# EAGLE board Basic_Arduino (EAGLE 9.6.2)
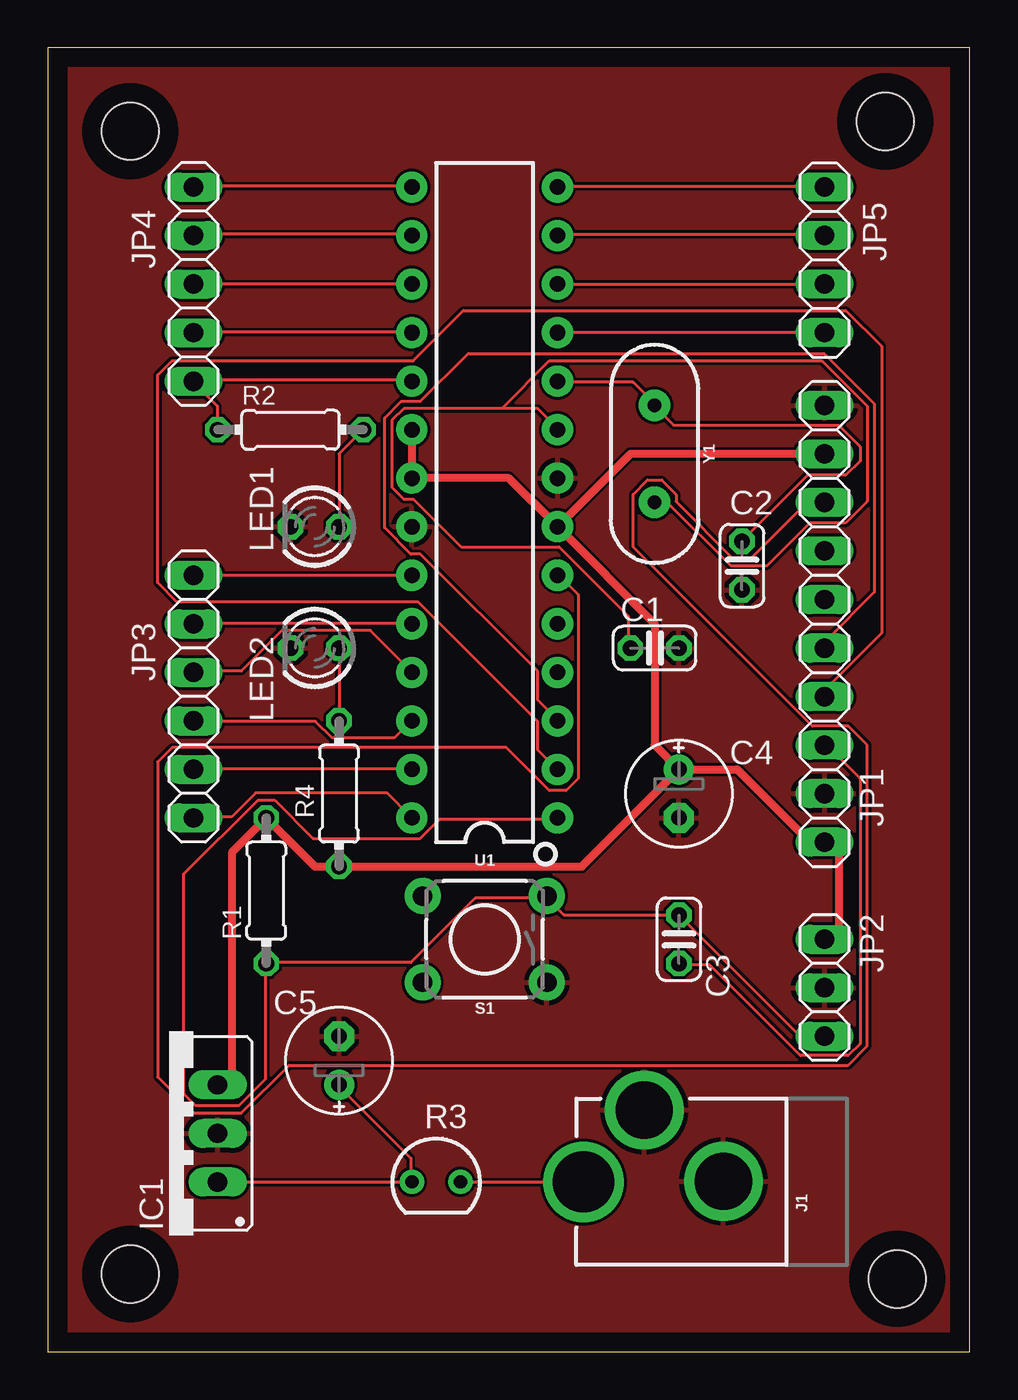
[diagram p0: board, top side]
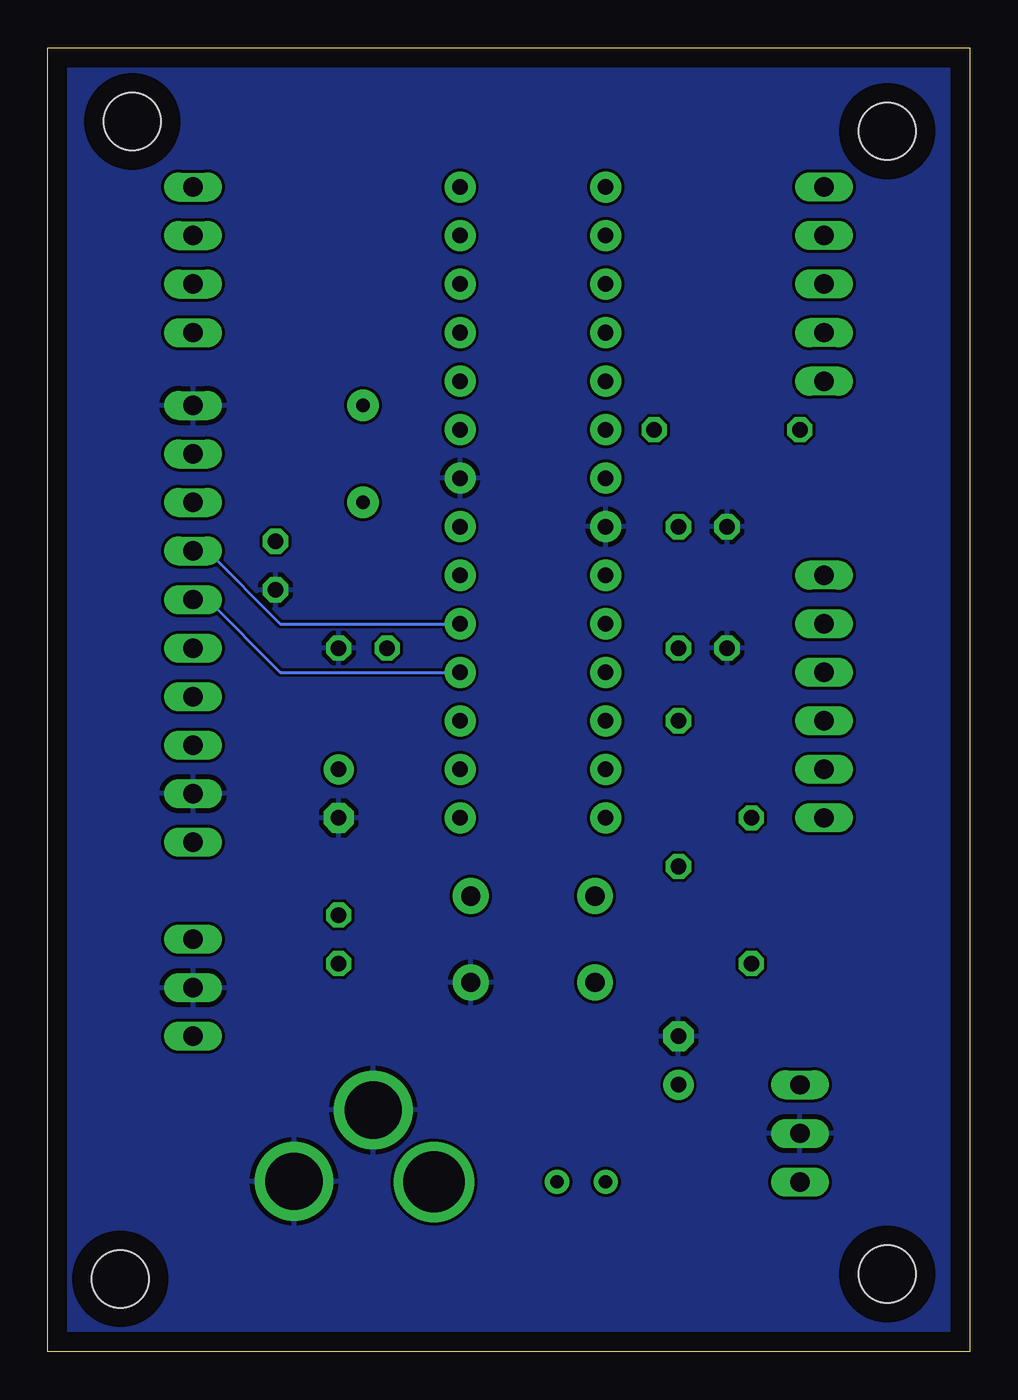
[diagram p1: board, bottom side, seen from below]

Size 48.24 x 68.25 mm. Coordinates in mm from the lower left corner, seen from the top.
Outline: 0,0 48.24,0 48.24,68.25 0,68.25 0,0
Copper layers (1*16): Top 0.035mm / dielectric 1.5mm / Bottom 0.035mm
Design rules "default": minimum track width 6mil, minimum drill 0.35mm, track to track 6mil, track to pad 6mil, pad to pad 6mil, via to via 6mil, smd to smd 6mil, copper to edge 40mil, drill to drill 6mil, minimum pad ring 10mil, minimum via ring 8mil, stop-mask expansion 4mil, vias tented up to drill 0mil, thermal gap 10mil
Holes 3 mm at 4.32,63.88 43.81,64.39 4.32,4.06 44.45,3.81

## Footprints (pad centres in the part's own frame; a part is rotated, then mirrored left to right if it is on the bottom)
C025-024X044 = drill 0.813 octagon: 1 -1.27,0; 2 1.27,0
E2,5-6E = drill 0.813 pad 1.575: + -1.27,0 | drill 0.813 pad 1.575 octagon: - 1.27,0
78XXS = drill 1.016 long: GND 0,-2.54; IN -2.54,-2.54; OUT 2.54,-2.54
POWER_JACK_PTH_LOCK = drill 2.997 pad 4.115: GND 0.025,6.557; GNDBREAK 3.762,10.7 | drill 3.2 pad 4.115: PWR 0,13.878
1X10 = drill 1.016 long: 1 -11.43,0; 2 -8.89,0; 3 -6.35,0; 4 -3.81,0; 5 -1.27,0; 6 1.27,0; 7 3.81,0; 8 6.35,0; 9 8.89,0; 10 11.43,0
1X03 = drill 1.016 long: 1 -2.54,0; 2 0,0; 3 2.54,0
1X06 = drill 1.016 long: 1 -6.35,0; 2 -3.81,0; 3 -1.27,0; 4 1.27,0; 5 3.81,0; 6 6.35,0
1X05 = drill 1.016 long: 1 -5.08,0; 2 -2.54,0; 3 0,0; 4 2.54,0; 5 5.08,0
1X04 = drill 1.016 long: 1 -3.81,0; 2 -1.27,0; 3 1.27,0; 4 3.81,0
LED3MM = drill 0.813 octagon: A -1.27,0; K 1.27,0
0204/7 = drill 0.813 octagon: 1 -3.81,0; 2 3.81,0
SOD70 = drill 0.7 pad 1.27: 1 -1.27,0; 2 1.27,0
TACTILE_SWITCH_PTH_6.0MM = drill 1.016 pad 1.88: 1 -3.251,2.261; 2 3.251,2.261; 3 -3.251,-2.261; 4 3.251,-2.261
DIP28 = drill 0.813 pad 1.626: 1 -16.51,-3.81; 2 -13.97,-3.81; 3 -11.43,-3.81; 4 -8.89,-3.81; 5 -6.35,-3.81; 6 -3.81,-3.81; 7 -1.27,-3.81; 8 1.27,-3.81; 9 3.81,-3.81; 10 6.35,-3.81; 11 8.89,-3.81; 12 11.43,-3.81; 13 13.97,-3.81; 14 16.51,-3.81; 15 16.51,3.81; 16 13.97,3.81; 17 11.43,3.81; 18 8.89,3.81; 19 6.35,3.81; 20 3.81,3.81; 21 1.27,3.81; 22 -1.27,3.81; 23 -3.81,3.81; 24 -6.35,3.81; 25 -8.89,3.81; 26 -11.43,3.81; 27 -13.97,3.81; 28 -16.51,3.81
HC49US = drill 0.7 pad 1.651: 1 -2.54,0; 2 2.54,0

## Placement (x,y rotation side)
C1  22pF  [C025-024X044]  31.75,36.83 0 top
C2  22pF  [C025-024X044]  36.32,41.15 270 top
C3  0.1uF  [C025-024X044]  33.02,21.59 270 top
C4  10uF  [E2,5-6E]  33.02,29.21 270 top
C5  10uF  [E2,5-6E]  15.24,15.24 90 top
IC1  [78XXS]  6.35,11.43 90 top
J1  POWER_JACKPTH_LOCK  [POWER_JACK_PTH_LOCK]  41.91,8.89 90 top
JP1  [1X10]  40.64,38.1 90 top
JP2  [1X03]  40.64,19.05 270 top
JP3  [1X06]  7.62,34.29 270 top
JP4  [1X05]  7.62,55.88 270 top
JP5  [1X04]  40.64,57.15 90 top
LED1  [LED3MM]  13.97,43.18 180 top
LED2  [LED3MM]  13.97,36.83 180 top
R1  10K  [0204/7]  11.43,24.13 90 top
R2  220E  [0204/7]  12.7,48.26 0 top
R3  PTC-SOD70  [SOD70]  20.32,8.89 0 top
R4  220E  [0204/7]  15.24,29.21 90 top
S1  SPST  [TACTILE_SWITCH_PTH_6.0MM]  22.86,21.59 180 top
U1  328P  [DIP28]  22.86,44.45 90 top
Y1  16MHz  [HC49US]  31.75,46.99 270 top

## Library data of the parts
C1-C5 = rcl; SPICEPREFIX: C
IC1 = v-reg
J1 = SparkFun-Connectors; PROD_ID: CONN-08197; SF_ID: PRT-00119
JP1-JP5 = pinhead
LED1 LED2 = led
R1 R2 R4 = rcl; SPICEPREFIX: R
R3 = ptc-ntc; OC_FARNELL: unknown; OC_NEWARK: unknown
S1 = SparkFun-Switches; PROD_ID: SWCH-08441; SF_SKU: COM-00097
U1 = SparkFun-IC-Microcontroller; PROD_ID: IC-09136
Y1 = SparkFun-Clocks; PROD_ID: XTAL-08181; SF_ID: COM-00536

## Nets
!RESET: C3.1 JP2.3 R1.1 S1.3 U1.1
A0: JP3.1 U1.23
A1: JP3.2 U1.24
A2: JP3.3 U1.25
A3: JP3.4 U1.26
A4: JP3.5 U1.27
A5: JP3.6 U1.28
D2: JP1.6 U1.4
D3: JP1.7 U1.5
D4: JP1.8 U1.6
D5: JP5.1 U1.11
D6: JP5.2 U1.12
D7: JP5.3 U1.13
D8: JP5.4 U1.14
D9: JP4.1 U1.15
D10: JP4.2 U1.16
D11: JP4.3 U1.17
D12: JP4.4 U1.18
D13: JP4.5 R2.1 U1.19
DTR: C3.2 JP1.3
GND: C1.2 C2.2 C4.- C5.- IC1.GND J1.GND J1.GNDBREAK JP1.2 JP1.10 JP2.2 LED1.K LED2.K S1.1 U1.8 U1.22
N$1: C1.1 U1.9 Y1.2
N$3: J1.PWR R3.2
N$4: LED2.A R4.2
N$5: C5.+ IC1.IN R3.1
N$22: C2.1 U1.10 Y1.1
N$23: LED1.A R2.2
RX: JP1.4 U1.2
TX: JP1.5 U1.3
VCC: C4.+ IC1.OUT JP1.1 JP1.9 JP2.1 R1.2 R4.1 U1.7 U1.20 U1.21

## Tracks (layer width: path | path; a pad name or v marks a point on that pad's centre or on a via)
!RESET
  Top 0.152: JP2.3 40.62,16.62 39.25,16.62 33.12,22.75 C3.1 33,22.88 27,22.88 26.12,23.75 S1.3 26,23.75 22.38,23.75 19,20.38 11.5,20.38 R1.1 11.38,20.25 11.38,14.25 10,12.88 7.75,12.88 7.12,13.5 7.12,25 11,28.88 11.88,28.88 13.88,26.88 19.5,26.88 20.5,27.88 26.62,27.88 U1.1
A0
  Top 0.152: JP3.1 7.62,40.62 19,40.62 U1.23
A1
  Top 0.152: JP3.2 7.62,38.12 19,38.12 U1.24
A2
  Top 0.152: JP3.3 7.62,35.62 10.12,35.62 12.25,37.75 16.88,37.75 19,35.62 U1.25
A3
  Top 0.152: JP3.4 7.62,33 14,33 14.88,32.12 18.12,32.12 19,33 U1.26
A4
  Top 0.152: JP3.5 7.62,30.5 19,30.5 U1.27
A5
  Top 0.152: JP3.6 7.62,28 9.62,28 10.88,29.25 17.75,29.25 19,28 U1.28
D2
  Bottom 0.152: JP1.6 39.88,39.37 36.07,35.56 U1.4
D3
  Bottom 0.152: JP1.7 39.88,41.91 36.07,38.1 U1.5
D4
  Top 0.152: JP1.8 40.62,44.38 39.62,44.38 36.75,41.5 35.88,41.5 32.88,44.5 32.88,44.88 32.12,45.62 31.38,45.62 30.62,44.88 30.62,42.12 40,32.75 41.88,32.75 42.88,31.75 42.88,16 41.88,15 12.62,15 10.12,12.5 7.62,12.5 5.75,14.38 5.75,30.88 6.5,31.62 24,31.62 26.25,29.38 27.12,29.38 27.75,30 27.75,39.62 26.75,40.62 U1.6
D5
  Top 0.152: JP5.1 40.62,53.38 26.75,53.38 U1.11
D6
  Top 0.152: JP5.2 40.62,55.88 26.75,55.88 U1.12
D7
  Top 0.152: JP5.3 40.62,58.5 26.75,58.5 U1.13
D8
  Top 0.152: JP5.4 40.62,61 26.75,61 U1.14
D9
  Top 0.152: JP4.1 7.62,61 19,61 U1.15
D10
  Top 0.152: JP4.2 7.62,58.5 19,58.5 U1.16
D11
  Top 0.152: JP4.3 19,55.88 U1.17
D12
  Top 0.152: JP4.4 7.62,53.38 19,53.38 U1.18
D13
  Top 0.152: R2.1 8.88,48.38 8.88,49.5 7.62,50.75 JP4.5 7.62,50.88 19,50.88 U1.19
DTR
  Top 0.152: C3.2 33.12,20.25 34.62,20.25 39.38,15.5 41.88,15.5 42.5,16.12 42.5,30 40.75,31.75 JP1.3
GND
  pour Bottom: -0.13,68.2 -0.13,0.13 0.13,-0.13 48.26,-0.13 48.26,67.94 48.01,68.2
  pour Top: 0.13,68.33 0.13,0.25 0,0.13 48.26,0.13 48.26,68.2 48.13,68.33
N$1
  Top 0.152: 23.75,49.38 25.62,49.38 26.62,48.38 U1.9 | 23.75,49.38 18.62,49.38 18,48.75 18,45.25 18.62,44.62 19.12,44.62 21.62,42.12 26.75,42.12 30.38,38.5 30.38,36.88 C1.1 | 23.75,49.38 26.25,51.88 40.5,51.88 42.88,49.5 42.88,44.5 41.75,43.38 39.88,43.38 37.62,41.12 35.75,41.12 32.5,44.38 31.75,44.38 Y1.2
N$3
  Top 0.152: R3.2 21.62,8.88 28,8.88 J1.PWR
N$4
  Top 0.152: R4.2 15.25,33.12 15.25,36.75 LED2.A
N$5
  Top 0.152: C5.+ 15.25,13.88 19,10.12 19,9 R3.1 19,8.88 9,8.88 IC1.IN
N$22
  Top 0.152: C2.1 36.38,42.5 39.75,45.88 41.75,45.88 42.5,46.62 42.5,47.38 41.38,48.5 32.75,48.5 31.75,49.5 Y1.1 31.75,49.62 30.62,50.75 26.75,50.75 U1.10
N$23
  Top 0.152: R2.2 15.25,47 15.25,43.25 LED1.A
RX
  Top 0.152: JP1.4 40.75,34.38 40.75,34.75 43.62,37.62 43.62,52.62 41.75,54.5 21.75,54.5 19.12,51.88 6.5,51.88 5.75,51.12 5.75,40.25 6.75,39.25 19.38,39.25 25.62,33 25.62,31.5 26.62,30.5 U1.2
TX
  Top 0.152: JP1.5 40.75,36.88 40.75,37.25 43.25,39.75 43.25,49.62 40.62,52.25 22,52.25 19.5,49.75 18.5,49.75 17.62,48.88 17.62,43.12 19,41.75 19.5,41.75 25.62,35.62 25.62,34.12 26.62,33.12 U1.3
VCC
  Top 0.406: U1.7 31.75,38.1 31.75,31.75 C4.+ | C4.+ 27.94,25.4 R4.1 13.97,25.4 R1.2 9.65,26.16 9.65,13.97 IC1.OUT | JP1.9 30.48,46.99 U1.7 | C4.+ 36.07,30.48 39.88,26.67 JP1.1 41.4,26.67 41.4,21.59 JP2.1 | U1.20 U1.21 24.13,45.72 U1.7